# Altium PCB amigaDIP40_v0.7_65816_2025-07-20.pcbdoc (part 2 of 2)
Units mm, origin at the board's own origin, x right, y up, seen from the top; angles counter-clockwise.
Board outline 96.27 x 48.65 mm, 2 copper layers (Top Layer, Bottom Layer); 37 components, 74 nets, 264 pads, 133 vias.
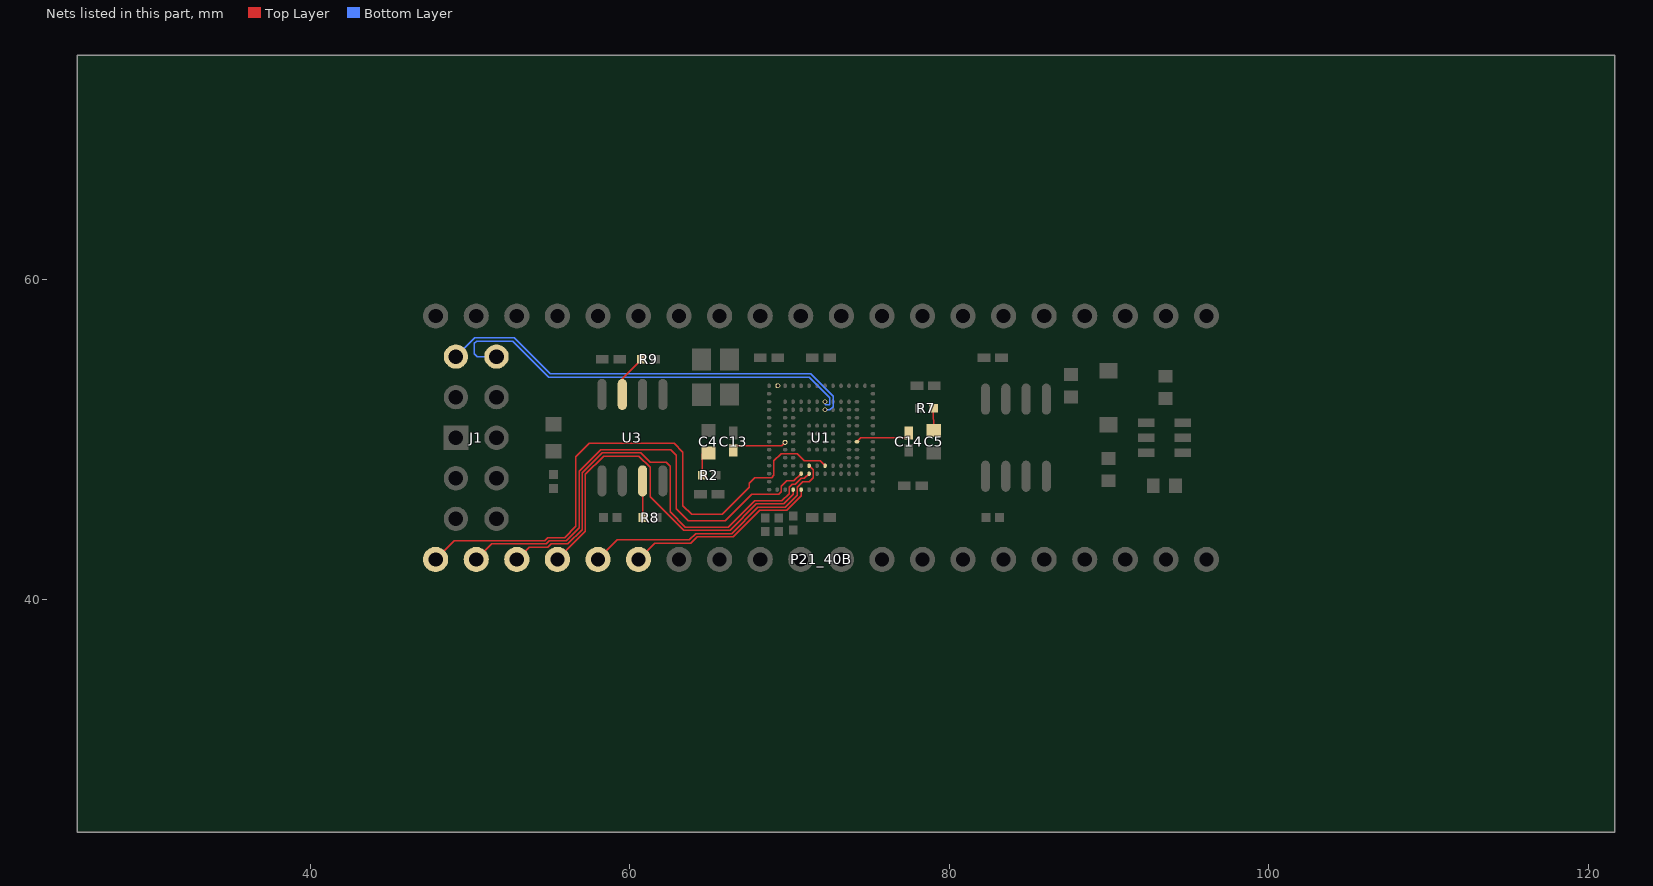
[diagram p2: the nets of this part, all layers, seen from the top]

## Via types
v1: diameter 0.45, hole 0.305, Top Layer to Bottom Layer, tented both sides, 93 vias
v2: diameter 0.305, hole 0.205, Top Layer to Bottom Layer, tented both sides, 40 vias

## Nets (pads, with @x,y where several pads share a name; then routed paths per layer and width w, separated by ;. In a path a pad name is that pad's centre, name@x,y a point inside that pad or via, vN(x,y) a via of type N, cw(c..) or ccw(c..) an arc to the next point about the centre after c; other vN are vias at no path point) (continued)
PIN35: P21_40B.15 U1.K14 | length 12.2
  Top Layer w0.09: P21_40B.15@60.545,42.48 61.566,43.501 63.827,43.501 64.225,43.9 66.476,43.9 68.124,45.551 69.826,45.551 70.725,46.45 U1.K14@70.725,46.851
PIN36: P21_40B.16 U1.J11 | length 16.7
  Top Layer w0.09: P21_40B.16@58.005,42.48 59.224,43.699 63.725,43.699 64.126,44.101 66.374,44.101 68.025,45.749 69.724,45.749 70.474,46.498 70.474,46.999 70.824,47.349 71.226,47.349 71.475,47.601 71.475,48.101 U1.J11@71.226,48.35
PIN37: P21_40B.17 U1.L14 | length 23.8
  Top Layer w0.09: P21_40B.17@55.465,42.48 57.225,44.24 57.225,47.801 58.373,48.949 60.573,48.949 61.271,48.248 61.271,46.399 63.369,44.301 66.275,44.301 67.926,45.95 69.625,45.95 70.225,46.549 U1.L14@70.225,46.85
PIN38: P21_40B.18 U1.J12 | length 28.4
  Top Layer w0.09: P21_40B.18@52.925,42.48 53.692,43.247 54.871,43.247 55.071,43.448 56.123,43.448 57.024,44.349 57.024,47.9 58.274,49.15 60.672,49.15 61.271,48.551 62.272,48.551 62.524,48.299 62.524,45.449 63.471,44.499 66.176,44.499 67.825,46.15 69.524,46.15 69.976,46.6 69.976,47.001 70.174,47.199 70.375,47.199 70.725,47.55 70.926,47.55 U1.J12@71.226,47.85
PIN39: P21_40B.19 U1.K12 | length 30.5
  Top Layer w0.09: P21_40B.19@50.385,42.48 51.353,43.448 54.772,43.448 54.97,43.648 56.024,43.648 56.824,44.449 56.824,47.999 58.175,49.351 62.572,49.351 62.922,49 62.922,45.65 63.672,44.901 65.975,44.901 67.624,46.549 69.323,46.549 69.476,46.702 69.476,47.05 69.826,47.4 70.276,47.4 U1.K12@70.725,47.85
PIN40: P21_40B.20 U1.G11 | length 36.3
  Top Layer w0.09: P21_40B.20@47.845,42.48 49.013,43.648 54.67,43.648 54.871,43.849 55.925,43.849 56.626,44.55 56.626,48.901 57.474,49.75 62.773,49.75 63.324,49.201 63.324,45.848 63.872,45.299 65.775,45.299 67.474,46.999 67.474,47.25 67.825,47.601 68.876,47.601 69.026,47.751 69.026,48.551 69.026,48.652 69.476,49.099 69.625,49.099 70.474,49.099 70.926,48.65 71.924,48.65 U1.G11@72.225,48.35
S$1126: 
S$128051: 
S$128064: 
S$265464: 
S$265471: 
S$384445: 
SPI_HOLD: R9.2 U3.7 | length 2.7
  Top Layer w0.09: U3.7@59.529,52.805 59.529,53.786 R9.2@60.743,55
SPI_WP: R8.2 U3.3 | length 2.3
  Top Layer w0.09: U3.3@60.799,47.395 60.799,45.099 R8.2@60.842,45.099
USER0: J1.9 U1.G4 | length 26.8
  Bottom Layer w0.09: J1.9@49.115,55.18 50.286,56.351 52.775,56.351 55.026,54.101 71.325,54.101 72.724,52.701 72.724,52.051 72.526,51.85 v2(72.225,51.85)
USER1: J1.10 U1.G3 | length 26.8
  Bottom Layer w0.09: J1.10@51.655,55.18 50.446,55.18 50.276,55.35 50.276,56 50.426,56.15 52.676,56.15 54.926,53.9 71.226,53.9 72.526,52.599 72.526,52.15 72.224,52.15 v2(72.225,52.35)
VCCPLL0: C4.2 C13.2 R2.2 U1.M8 U1.N1 | length 10.8
  Top Layer w0.09: R2.2@64.543,47.751 64.543,49.099 64.924,49.099 C4.2@64.925,49.15 ; C13.2@66.476,49.305 66.476,49.6 69.526,49.6 v2(69.725,49.8)
  Mid-Layer 2 w0.09: v2@69.275,53.349 68.975,53.651 68.475,53.651 68.325,53.501 68.325,51.901 69.724,50.499 v2(69.725,49.8)
  other v2: 69.275,53.35
VCCPLL1: C5.2 C14.2 R7.2 U1.C8 | length 5
  Top Layer w0.09: U1.C8@74.225,49.851 74.474,50.1 77.474,50.1 C14.2@77.474,50.395 ; R7.2@79.008,51.949 C5.2@79.026,50.55
pads on no net: U1.A13

## Polygon pours and split planes (outlines as drawn)
GND on Mid-Layer 2 (solid): 38.975,60.1 38.975,40.1 105.975,40.1 105.975,60.1
+1.2VDC on Mid-Layer 1 (solid): 70.975,54.4 70.975,45.8 72.975,45.8 72.975,48.05 72.975,54.4
+5.0VDC on Mid-Layer 1 (solid): 38.475,60.1 108.975,60.1 108.975,38.1 38.475,38.1 38.475,44.1 47.575,44.1 47.725,44.15 48.025,44.35 48.275,44.6 52.225,44.6 52.475,44.35 52.725,44.15 52.875,44.1 94.975,44.1 94.975,56.1 57.975,56.1 38.475,56.1
+3.3VDC on Mid-Layer 1 (solid): 38.975,56.1 38.975,44.1 58.975,44.1 94.975,44.1 94.975,56.1 57.975,56.1
GND on Top Layer (solid): 38.375,61.35 105.875,61.35 105.875,38.725 38.375,38.725 38.375,50.475
GND on Bottom Layer (solid): 38.1,61.35 105.6,61.35 105.6,38.725 38.1,38.725 38.1,50.475

## Keep-outs
Keep-Out Layer:
  lines w0.254: 45.305,41.845 ccw(c45.94,41.845) 45.94,41.21 ; 45.305,58.355 cw(c45.94,58.355) 45.94,58.99 ; 98.01,41.21 ccw(c98.01,41.845) 98.645,41.845 ; 98.01,58.99 cw(c98.01,58.355) 98.645,58.355

## Other copper
Top Layer:
  region net PIN10: 70.225,51.95 70.335,51.817 70.415,51.976 70.384,52.073
  region net PIN7: 69.615,52.317 69.615,52.383 69.48,52.408 69.48,52.318
  region net PIN23: 74.335,47.883 74.225,47.75 74.384,47.627 74.414,47.724
  region net PIN25: 73.836,48.383 73.725,48.25 73.884,48.127 73.915,48.224
  region net PIN11: 75.192,53.46 75.325,53.35 75.448,53.509 75.351,53.54
  region net ICE_SS: 68.693,47.24 68.691,47.461 68.557,47.394 68.557,47.304
  region net ICE_CLK: 68.693,50.239 68.691,50.46 68.557,50.394 68.557,50.304
  region net PIN2: 68.692,51.239 68.692,51.46 68.557,51.395 68.557,51.305
  region net PIN4: 68.692,51.74 68.692,51.961 68.557,51.895 68.557,51.805
  region net PIN6: 68.692,52.46 68.692,52.239 68.557,52.306 68.557,52.396
  region net CDONE: 69.758,48.74 69.625,48.9 69.504,48.693 69.6,48.662
  region net VCCPLL0: 69.843,49.779 69.673,49.921 69.637,49.776 69.706,49.718
  region net PIN3: 69.693,50.74 69.691,50.961 69.557,50.894 69.557,50.804
  region net PIN9: 69.692,51.961 69.825,51.8 69.947,52.008 69.851,52.039
  region net PIN37: 70.335,46.817 70.114,46.817 70.18,46.682 70.27,46.682
  region net PIN1: 70.192,49.961 70.325,49.8 70.449,50.012 70.352,50.042
  region net GNDPLL0: 70.342,50.279 70.174,50.421 70.136,50.276 70.205,50.218
  region net PIN5: 70.125,50.8 70.258,50.961 70.099,51.039 70.003,51.007
  region net PIN35: 70.836,46.817 70.615,46.817 70.68,46.682 70.77,46.682
  region net PIN39: 70.725,47.75 70.615,47.883 70.537,47.725 70.568,47.629
  region net PIN38: 71.225,47.75 71.114,47.883 71.037,47.725 71.069,47.63
  region net PIN36: 71.335,48.383 71.225,48.25 71.386,48.126 71.416,48.223
  region net PIN34: 71.836,47.818 71.615,47.816 71.681,47.682 71.771,47.682
  region net PIN33: 71.836,48.383 71.725,48.25 71.887,48.126 71.916,48.223
  region net PIN32: 72.335,47.883 72.225,47.75 72.38,47.63 72.412,47.725
  region net PIN40: 72.114,48.317 72.225,48.45 72.063,48.574 72.034,48.477
  region net PIN31: 72.836,46.816 72.615,46.818 72.679,46.682 72.769,46.682
  region net PIN30: 72.836,47.816 72.615,47.818 72.679,47.682 72.769,47.682
  region net PIN29: 73.335,47.883 73.225,47.75 73.385,47.628 73.415,47.724
  region net PIN28: 73.836,46.817 73.615,46.817 73.68,46.682 73.77,46.682
  region net PIN27: 73.836,47.817 73.615,47.817 73.68,47.682 73.77,47.682
  region net GNDPLL1: 73.825,49.85 73.692,49.74 73.85,49.662 73.946,49.694
  region net PIN16: 73.825,51.35 73.692,51.239 73.851,51.16 73.948,51.19
  region net PIN26: 74.335,46.817 74.114,46.817 74.18,46.682 74.27,46.682
  region net VCCPLL1: 74.192,49.961 74.325,49.85 74.448,50.01 74.351,50.041
  region net PIN20: 74.192,50.46 74.325,50.35 74.446,50.508 74.35,50.539
  region net PIN18: 74.258,50.961 74.257,50.74 74.393,50.804 74.393,50.894
  region net PIN14: 74.258,51.239 74.258,51.46 74.393,51.395 74.393,51.305
  region net PIN13: 74.325,51.85 74.107,51.921 74.325,52.05 74.375,52
  region net PIN24: 74.836,46.818 74.615,46.816 74.681,46.682 74.771,46.682
  region net PIN22: 75.258,47.961 75.257,47.74 75.393,47.805 75.393,47.895
  region net +3.3VDC: 75.259,49.961 75.257,49.74 75.407,49.799 75.408,49.899
  region net PIN19: 75.258,50.961 75.257,50.74 75.393,50.804 75.393,50.894
  region net PIN17: 75.258,51.239 75.258,51.46 75.393,51.395 75.393,51.305
  region net PIN15: 75.258,51.74 75.258,51.961 75.393,51.895 75.393,51.805
  region net PIN12: 75.258,52.961 75.257,52.74 75.393,52.804 75.393,52.894
  region net ICE_MISO: 62.184,51.854 61.959,51.852 62.028,51.718 62.118,51.719
  region net ICE_SCK: 60.912,51.853 60.687,51.853 60.754,51.718 60.844,51.718
  region net SPI_HOLD: 59.641,53.757 59.416,53.757 59.484,53.786 59.574,53.786
  region net +3.0VDC: 58.543,53.496 57.975,53.496 58.034,54.171 58.484,54.171
  region net SPI_WP: 60.912,46.443 60.687,46.443 60.754,46.308 60.844,46.308
  region net ICE_MOSI: 59.64,48.348 59.415,48.346 59.481,48.482 59.571,48.482
  region net ICE_SS: 58.381,46.448 58.157,46.439 58.229,46.307 58.319,46.31
  region net DAT_EN: 82.12,46.755 81.992,46.94 81.919,46.808 81.971,46.733
  region net DAT1: 83.286,46.869 83.256,47.092 83.225,47.012 83.256,46.916
  region net DAT2: 84.526,48.336 84.586,48.553 84.557,48.481 84.525,48.385
  region net +3.0VDC: 82.554,53.204 81.986,53.204 82.044,53.879 82.495,53.879
  region net DAT3: 83.647,51.559 83.422,51.564 83.487,51.427 83.577,51.425
  region net DAT_CLK: 84.917,51.559 84.692,51.564 84.757,51.427 84.847,51.425
  region net DAT0: 85.892,53.417 85.796,53.214 85.754,53.306 85.795,53.392
  region net CDONE: 55.339,48.8 55.114,48.8 55.181,48.665 55.271,48.665
  region net +3.3VDC: 65.65,54.839 65.65,55.7 65.376,55.626 65.376,55.176
  region net +3.3VDC: 65.65,54.3 65.65,55.163 65.376,54.826 65.376,54.376
  region net ICE_CLK: 66.85,52.913 66.85,52.688 66.985,52.755 66.985,52.845
  region net +3.3VDC: 65.1,55.7 65.1,54.839 65.376,55.176 65.376,55.626
  region net +3.3VDC: 65.1,55.163 65.1,54.3 65.376,54.376 65.376,54.826
  region net +3.3VDC: 68.745,43.934 68.745,44.5 69.278,44.395 69.278,44.04
  region net +3.3VDC: 68.205,43.934 68.247,44.5 68.052,44.676 67.909,44.316
  region net +3.0VDC: 61.719,55.27 61.494,55.27 61.562,55.405 61.652,55.405
  region net SPI_HOLD: 60.649,54.73 60.459,54.851 60.405,54.726 60.483,54.676
  region net +3.0VDC: 61.601,44.83 61.826,44.83 61.76,44.695 61.67,44.695
  region net SPI_WP: 60.686,45.37 60.911,45.37 60.844,45.505 60.754,45.505
  region net VCCPLL1: 79.124,51.68 78.899,51.68 78.968,51.545 79.058,51.545
  region net +3.3VDC: 69.595,43.934 69.595,44.5 70.128,44.494 70.128,44.139
  region net +3.3VDC: 69.055,44.5 69.055,43.934 68.522,44.04 68.522,44.395
  region net +3.3VDC: 69.955,44.6 69.955,44.034 69.425,44.139 69.425,44.494
  region net +3.0VDC: 83.046,44.83 83.271,44.83 83.204,44.695 83.114,44.695
  region net DAT_EN: 82.009,45.243 82.195,45.37 82.032,45.422 81.957,45.371
  region net +1.2VDC: 65.125,48.02 65.691,47.48 65.96,48.052 65.671,48.328
  region net VCCPLL0: 64.43,48.02 64.655,48.02 64.588,48.155 64.498,48.155
  region net CDONE: 55.339,48.066 55.114,48.066 55.181,48.201 55.271,48.201
  region net +3.3VDC: 54.955,46.805 54.955,47.03 54.82,46.962 54.82,46.872
  region net +3.0VDC: 81.785,55.37 82.575,55.37 82.495,56.045 82.044,56.045
  region net +3.0VDC: 82.575,54.83 81.785,54.83 82.044,54.155 82.495,54.155
  region net +3.0VDC: 58.675,54.73 57.885,54.73 58.034,54.055 58.484,54.055
  region net +3.0VDC: 57.885,55.27 58.675,55.27 58.484,55.945 58.034,55.945
  region net GNDPLL1: 77.205,49.7 77.205,49.487 77.07,49.555 77.07,49.645
  region net VCCPLL1: 77.205,50 77.205,50.213 77.07,50.145 77.07,50.055
  region net GNDPLL0: 66.745,50 66.745,50.213 66.88,50.145 66.88,50.055
  region net VCCPLL0: 66.745,49.7 66.745,49.487 66.88,49.555 66.88,49.645
  region net +1.2VDC: 71.035,45.37 71.825,45.37 71.65,45.849 71.2,45.848
  region net +1.2VDC: 72.915,54.83 72.125,54.83 72.25,54.349 72.7,54.349
  region net +3.3VDC: 65.125,46.82 65.915,46.82 65.726,47.05 65.326,47.05
  region net +3.3VDC: 76.785,46.83 76.785,47.37 76.476,47.325 76.476,46.875
  region net VCCPLL1: 78.908,50.95 79.133,50.95 79.064,51.085 78.974,51.085
  region net VCCPLL0: 64.655,48.75 64.475,48.75 64.498,48.615 64.588,48.615
  region net +3.0VDC: 59.101,44.83 59.325,44.83 59.26,44.695 59.17,44.695
  region net ICE_SS: 58.162,45.37 58.387,45.37 58.319,45.505 58.229,45.505
  region net VCCPLL0: 69.573,49.809 69.735,49.648 69.611,49.621 69.547,49.684
  region net GNDPLL0: 70.073,50.31 70.234,50.148 70.109,50.122 70.046,50.186
  region net +3.3VDC: 65.694,46.902 65.357,46.901 65.326,46.743 65.726,46.744
  region net +3.3VDC: 68.15,44.565 67.912,44.325 68.017,44.208 68.268,44.46
  region net CDONE: 57.75,49.236 57.511,49.475 57.71,49.498 57.774,49.434
  region net CDONE: 55.394,48.302 55.057,48.301 55.181,48.144 55.271,48.144
  region net CDONE: 55.394,48.598 55.057,48.599 55.181,48.757 55.271,48.756
  region net ICE_CLK: 66.926,52.631 66.926,52.969 66.769,52.845 66.769,52.755
  region net ICE_CLK: 67.288,50.573 67.121,50.28 67.316,50.304 67.367,50.394
  region net DAT0: 85.625,53.518 85.623,53.181 85.775,53.304 85.775,53.394
  region net DAT_CLK: 84.971,51.392 84.633,51.392 84.757,51.549 84.847,51.549
  region net DAT3: 83.701,51.392 83.363,51.392 83.487,51.549 83.577,51.549
  region net DAT2: 84.424,48.618 84.423,48.281 84.525,48.404 84.525,48.494
  region net DAT1: 83.125,47.117 83.122,46.78 83.224,46.903 83.225,46.993
  region net DAT_EN: 81.99,46.635 81.813,46.922 82.011,46.9 82.06,46.822
  region net DAT_EN: 81.943,46.551 81.606,46.552 81.729,46.394 81.819,46.394
  region net ICE_SCK: 60.981,51.713 60.644,51.684 60.754,51.851 60.844,51.859
  region net ICE_MISO: 62.243,51.7 61.905,51.697 62.028,51.856 62.118,51.857
  region net ICE_MOSI: 59.695,48.402 59.357,48.4 59.481,48.243 59.571,48.244
  region net ICE_SS: 58.443,46.249 58.106,46.248 58.229,46.406 58.319,46.406
  region net ICE_SS: 58.443,45.951 58.106,45.952 58.229,45.794 58.319,45.794
  region net ICE_SS: 68.237,47.125 68.073,47.42 68.267,47.394 68.318,47.304
  region net +1.2VDC: 66.039,48.175 65.8,48.414 65.667,48.324 65.95,48.042
  region net +3.0VDC: 83.336,44.258 82.999,44.239 83.114,44.403 83.204,44.408
  region net +3.3VDC: 77.927,49.68 77.926,50.018 77.769,49.899 77.769,49.799
  region net +3.0VDC: 59.391,44.252 59.054,44.246 59.174,44.405 59.264,44.407
  region net +3.0VDC: 61.892,44.251 61.554,44.246 61.676,44.406 61.766,44.407
  region net +3.0VDC: 61.785,55.941 61.448,55.962 61.562,55.797 61.652,55.792
  region net PIN22: 92.805,42.432 93.613,43.24 92.863,43.245 92.8,43.182
  region net PIN23: 90.264,42.434 91.074,43.24 90.325,43.247 90.261,43.183
  region net PIN24: 87.725,42.432 88.533,43.24 87.783,43.245 87.72,43.182
  region net PIN25: 85.185,42.432 85.993,43.24 85.243,43.245 85.18,43.182
  region net PIN26: 82.645,42.432 83.453,43.24 82.703,43.245 82.64,43.182
  region net PIN27: 80.105,42.432 80.913,43.24 80.163,43.245 80.1,43.182
  region net PIN28: 77.565,42.432 78.373,43.24 77.623,43.245 77.56,43.182
  region net PIN29: 76.357,42.984 75.214,42.984 75.74,43.517 75.83,43.517
  region net PIN30: 72.8,43.099 73.914,42.844 73.521,43.481 73.431,43.502
  region net PIN31: 71.209,41.909 71.209,43.052 71.742,42.525 71.742,42.435
  region net PIN32: 68.669,41.909 68.669,43.052 69.056,42.525 69.056,42.435
  region net PIN33: 65.577,43.24 66.386,42.432 66.39,43.182 66.327,43.245
  region net PIN34: 63.037,43.24 63.846,42.432 63.85,43.182 63.787,43.245
  region net PIN35: 60.497,43.24 61.306,42.432 61.31,43.182 61.247,43.245
  region net PIN36: 57.957,43.24 58.766,42.432 58.77,43.182 58.707,43.245
  region net PIN37: 55.417,43.24 56.226,42.432 56.23,43.182 56.167,43.245
  region net PIN38: 52.877,43.24 53.686,42.432 53.69,43.182 53.627,43.245
  region net PIN39: 50.337,43.24 51.146,42.432 51.15,43.182 51.087,43.245
  region net PIN40: 47.797,43.24 48.606,42.432 48.61,43.182 48.547,43.245
  region net PIN1: 48.416,57.216 47.273,57.216 47.8,56.683 47.89,56.683
  region net PIN2: 50.956,57.216 49.813,57.216 50.34,56.683 50.43,56.683
  region net PIN3: 52.877,56.959 53.686,57.768 53.69,57.018 53.627,56.955
  region net PIN4: 55.417,56.959 56.226,57.768 56.23,57.018 56.167,56.955
  region net PIN5: 57.957,56.959 58.766,57.768 58.77,57.018 58.707,56.955
  region net PIN6: 61.217,58.079 60.818,57.008 61.5,57.311 61.534,57.404
  region net PIN7: 63.037,56.959 63.846,57.768 63.85,57.018 63.787,56.955
  region net PIN9: 68.893,57.944 68.296,56.969 69.026,57.139 69.074,57.218
  region net PIN10: 70.657,56.959 71.466,57.768 71.47,57.018 71.407,56.955
  region net PIN11: 73.197,56.959 74.006,57.768 74.01,57.018 73.947,56.955
  region net PIN12: 76.3,57.159 75.164,57.279 75.631,56.693 75.721,56.684
  region net PIN13: 77.565,57.768 78.373,56.959 77.623,56.955 77.56,57.018
  region net PIN14: 81.437,57.216 80.294,57.216 80.82,56.683 80.91,56.683
  region net PIN15: 82.901,58.292 82.901,57.149 82.368,57.675 82.368,57.765
  region net PIN16: 86.517,57.216 85.374,57.216 85.9,56.683 85.99,56.683
  region net PIN17: 87.981,58.292 87.981,57.149 87.448,57.675 87.448,57.765
  region net PIN18: 91.571,57.189 90.429,57.245 90.929,56.686 91.019,56.682
  region net PIN19: 92.805,57.768 93.613,56.959 92.863,56.955 92.8,57.018
  region net PIN20: 96.454,57.043 95.39,57.458 95.682,56.771 95.774,56.736
  region net +3.3VDC: 49.067,51.88 49.876,52.688 49.88,51.938 49.817,51.875
  region net +3.0VDC: 86.925,56.3 87.025,56.4 90.725,56.4 90.825,56.3 90.825,53.7 90.725,53.6 87.025,53.6 86.925,53.7
  region net +3.3VDC: 92.875,51.55 87.575,51.55 87.475,51.45 87.475,48.2 87.575,48.1 90.875,48.1 90.975,48.2 90.975,50.55 91.075,50.65 92.875,50.65 92.975,50.75 92.975,51.45
  region net +1.2VDC: 92.325,53.1 92.225,53 92.225,51.8 92.325,51.7 93.025,51.7 93.125,51.6 93.125,50.75 93.225,50.65 95.875,50.65 95.975,50.75 95.975,53 95.875,53.1
  region net +5.0VDC: 91.775,49.5 91.775,48.7 91.875,48.6 93.375,48.6 93.475,48.5 93.475,46.7 93.575,46.6 95.875,46.6 95.975,46.7 95.975,50.4 95.875,50.5 93.225,50.5 93.125,50.4 93.125,49.7 93.025,49.6 91.875,49.6
  region net GNDPLL0: 65.352,50.872 65.451,50.773 66.571,50.773 66.233,50.436 66.233,50.204 66.121,50.316 65.457,50.31 65.334,50.209
  region net +3.3VDC: 64.967,55.55 65.856,55.55 65.856,54.61 65.001,54.61 65.001,54.615
  region net GNDPLL1: 78.61,48.817 78.51,48.917 77.39,48.917 77.728,49.254 77.728,49.485 77.853,49.34 78.489,49.348 78.627,49.48
  region net VCCPLL1: 78.605,50.884 78.506,50.785 77.386,50.785 77.724,50.447 77.724,50.216 77.849,50.362 78.485,50.354 78.623,50.221
  region net VCCPLL0: 65.357,48.821 65.456,48.92 66.576,48.92 66.238,49.258 66.238,49.489 66.113,49.343 65.478,49.351 65.339,49.484
Mid-Layer 1:
  region net +3.0VDC: 87.655,56.337 ccw(c87.993,56.674) 87.993,56.197 88.358,56.197 88.358,56.031 ccw(c88.387,56.031) 88.367,56.011 88.047,56.011 ccw(c88.047,55.404) 87.617,55.833 87.655,56.337
  region net +3.0VDC: 61.874,43.931 61.874,44.269 62.031,44.2 62.031,44
  region net +3.0VDC: 61.576,43.931 61.576,44.269 61.419,44.2 61.419,44
  region net +3.0VDC: 59.374,43.931 59.374,44.269 59.531,44.2 59.531,44
  region net +3.0VDC: 87.624,55.931 87.624,56.269 87.781,56.2 87.781,56
  region net +3.0VDC: 83.324,43.931 83.324,44.269 83.481,44.2 83.481,44
  region net +3.0VDC: 83.026,43.931 83.026,44.269 82.869,44.2 82.869,44
Mid-Layer 2:
  region net GNDPLL0: 68.523,53.362 68.682,53.198 68.571,53.159 68.481,53.252
  region net VCCPLL0: 69.123,53.34 69.284,53.502 69.16,53.529 69.096,53.465
  region net GNDPLL0: 70.073,50.291 70.235,50.452 70.11,50.479 70.047,50.415
  region net VCCPLL0: 69.839,49.901 69.61,49.9 69.68,50.007 69.77,50.008
Bottom Layer:
  region net CDONE: 57.54,49.025 57.301,49.264 57.277,49.065 57.341,49.001
  region net CDONE: 55.45,48.464 55.211,48.225 55.395,48.217 55.459,48.28
  region net CDONE: 55.239,48.675 55.001,48.436 54.977,48.635 55.04,48.698
  region net ICE_CLK: 67.244,52.651 66.906,52.651 67.03,52.494 67.12,52.494
  region net ICE_CLK: 67.244,50.649 66.906,50.649 67.03,50.806 67.12,50.806
  region net CRESET_B: 70.5,45.436 70.261,45.675 70.46,45.699 70.523,45.635
  region net CRESET_B: 70.127,45.281 70.126,45.618 69.969,45.494 69.969,45.404
  region net CBSEL1: 69.787,45.224 69.622,44.93 69.817,44.955 69.867,45.045
  region net CBSEL0: 68.874,45.318 68.874,44.981 68.975,45.105 68.975,45.195
  region net DAT_CLK: 74.111,52.249 74.34,52.249 74.27,52.15 74.18,52.15
  region net DAT0: 85.49,53.125 85.25,53.364 85.227,53.165 85.291,53.101
  region net DAT_CLK: 84.816,51.468 84.577,51.229 84.554,51.428 84.617,51.491
  region net DAT3: 83.546,51.019 83.307,51.257 83.284,51.058 83.347,50.995
  region net DAT2: 84.443,48.6 84.105,48.598 84.229,48.756 84.319,48.757
  region net DAT1: 82.99,47.174 82.75,46.937 82.727,47.135 82.791,47.199
  region net DAT_EN: 81.943,46.849 81.606,46.848 81.729,47.006 81.819,47.006
  region net ICE_SCK: 60.974,51.381 60.974,51.719 61.131,51.595 61.131,51.505
  region net ICE_MISO: 61.926,51.719 61.926,51.381 61.769,51.505 61.769,51.595
  region net ICE_MISO: 62.224,51.381 62.224,51.719 62.381,51.595 62.381,51.505
  region net ICE_SS: 58.289,45.875 58.05,46.114 58.026,45.915 58.09,45.852
  region net ICE_SS: 58.499,46.086 58.261,46.325 58.46,46.348 58.523,46.285
  region net CBSEL0: 70.351,49.485 70.294,49.264 70.413,49.297 70.439,49.398
  region net DAT_EN: 73.216,51.748 73.377,51.91 73.404,51.785 73.34,51.721
  region net DAT3: 73.716,52.198 73.877,52.36 73.904,52.235 73.84,52.172
  region net DAT0: 74.889,53.249 74.66,53.25 74.729,53.143 74.819,53.142
  region net DAT2: 74.165,53.198 74.327,53.359 74.353,53.234 74.289,53.171
  region net DAT1: 73.611,51.799 73.839,51.799 73.77,51.692 73.68,51.692
  region net ICE_SS: 70.265,53.198 70.427,53.359 70.453,53.235 70.39,53.171
  region net ICE_SCK: 70.716,52.002 70.877,51.84 70.904,51.965 70.84,52.029
  region net ICE_MISO: 71.889,52.249 71.66,52.25 71.729,52.143 71.819,52.142
  region net ICE_MISO: 71.889,52.451 71.66,52.45 71.729,52.557 71.819,52.558
  region net USER0: 72.326,51.736 72.326,51.964 72.433,51.895 72.433,51.805
  region net USER1: 72.339,52.248 72.11,52.25 72.179,52.15 72.269,52.15
  region net CRESET_B: 70.216,48.648 70.377,48.809 70.404,48.685 70.34,48.621
  region net ICE_MISO: 69.624,48.236 69.624,48.464 69.517,48.395 69.517,48.305
  region net CBSEL1: 68.716,48.952 68.877,48.789 68.904,48.914 68.841,48.978
  region net ICE_SS: 67.856,47.349 68.194,47.349 68.07,47.451 67.98,47.451
  region net CDONE: 49.067,45.781 49.876,44.972 49.88,45.722 49.817,45.786
  region net ICE_SS: 52.159,44.449 52.159,45.592 52.693,45.065 52.693,44.975
  region net CRESET_B: 48.832,46.853 48.449,47.93 48.121,47.26 48.154,47.166
  region net ICE_MISO: 52.159,52.069 52.159,53.212 52.693,52.685 52.693,52.595
  region net USER0: 49.067,55.941 49.876,55.132 49.88,55.882 49.817,55.946
  region net USER1: 51.151,54.609 51.151,55.752 50.618,55.225 50.618,55.135

## Silkscreen, mask and mechanical layers (free items; w line width, h text height)
Bottom Overlay:
  lines w0.254 net S$128051: 45.884,51.355 45.884,56.435
  lines w0.254 net S$128064: 45.884,43.735 45.884,48.815 ccw(c45.884,50.085) 47.154,50.085 ccw(c45.884,50.085) 45.884,51.355
  text "UB" at 54.521,54.651 h1.8
  text "UA" at 48.369,54.601 h1.8
  text "SO" at 54.495,52.109 h1.8
  text "33" at 48.359,52.022 h1.8
  text "BP65816" at 82.378,50.1 h5
  text "SI" at 54.381,49.564 h1.8 r359
  text "BUFFEE MINI / v0.7" at 81.5,47.56 h2.5
  text "SC" at 54.449,47.019 h1.8
  text "RT" at 48.413,46.968 h1.8
  text "(c) 2023" at 71.725,45.1 h2
  text "SS" at 54.452,44.474 h1.8
  text "DN" at 48.43,44.424 h1.8
Document:
  drawing of 102 lines, arcs and shapes, not listed
  text "PIN 1" at 46.607,56.218 h1 r90
  text "Bank 3" at 70.076,53.325 h0.8
  text "Bank 2" at 67.079,52.711 h0.8 r270
  text "Bank 0" at 75.363,52.158 h0.8 r270
  text "SPI" at 67.14,46.999 h0.8
  text "Bank 1" at 70.413,45.242 h0.8
  text "PIN 40" at 46.556,40.606 h1 r90
  text "1V2" at 67.682,40.21 h0.4
  text "3V3" at 67.683,39.71 h0.4
  text "CLK" at 67.682,39.21 h0.4
  text "GND" at 67.683,38.71 h0.4